# Altium PCB LPGDetA1_F.PcbDoc
Units mm, origin at the board's own origin, x right, y up, seen from the top; angles counter-clockwise.
Board outline 226 x 216 mm, 2 copper layers (Top Layer, Bottom Layer); 2 components, 0 nets, 6 pads, 0 vias.
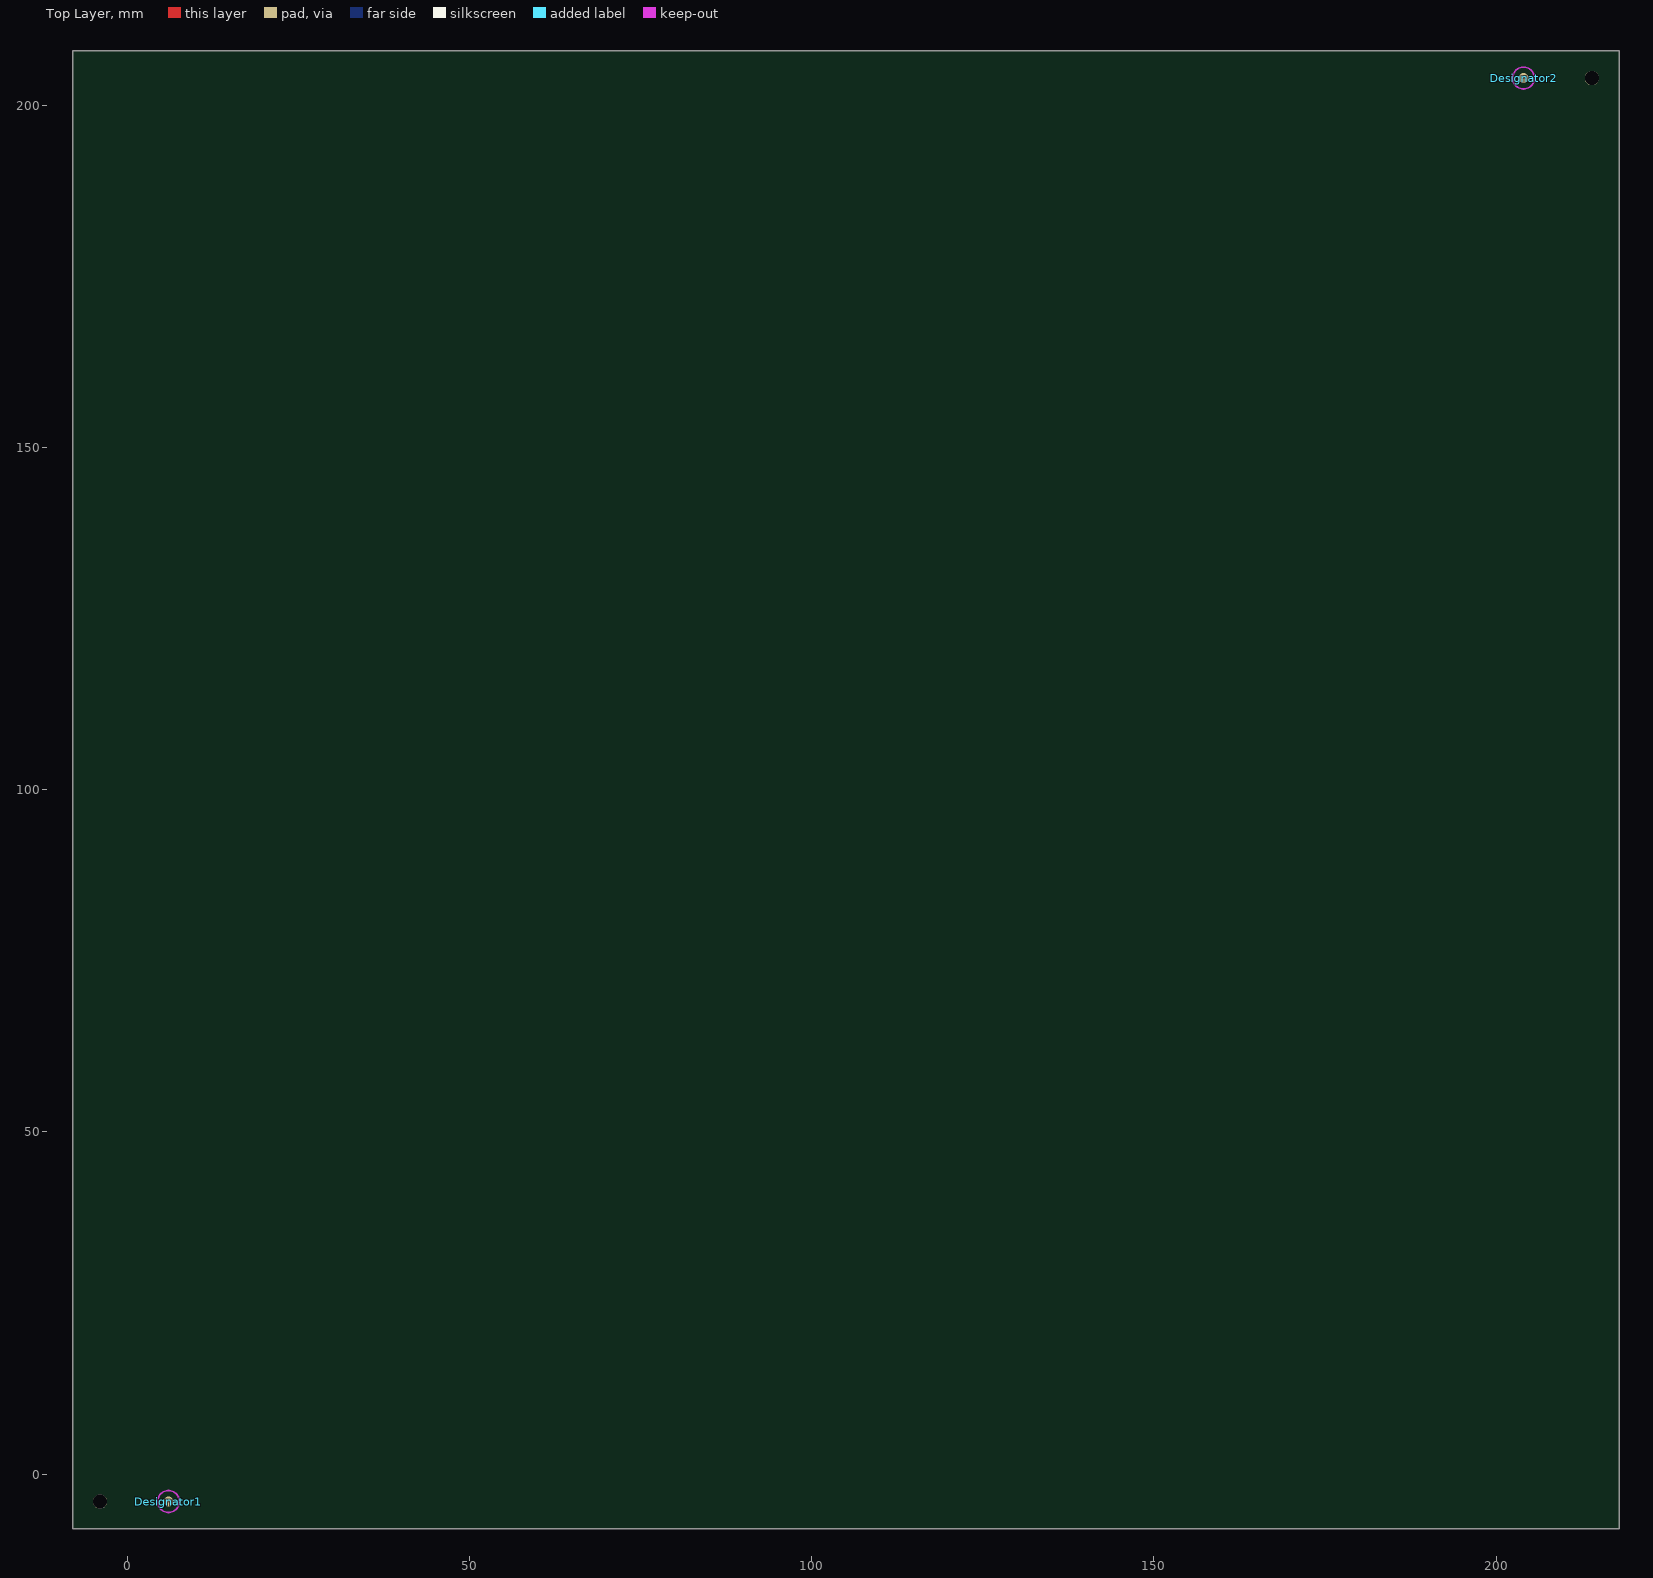
[diagram p0: Top Layer view]
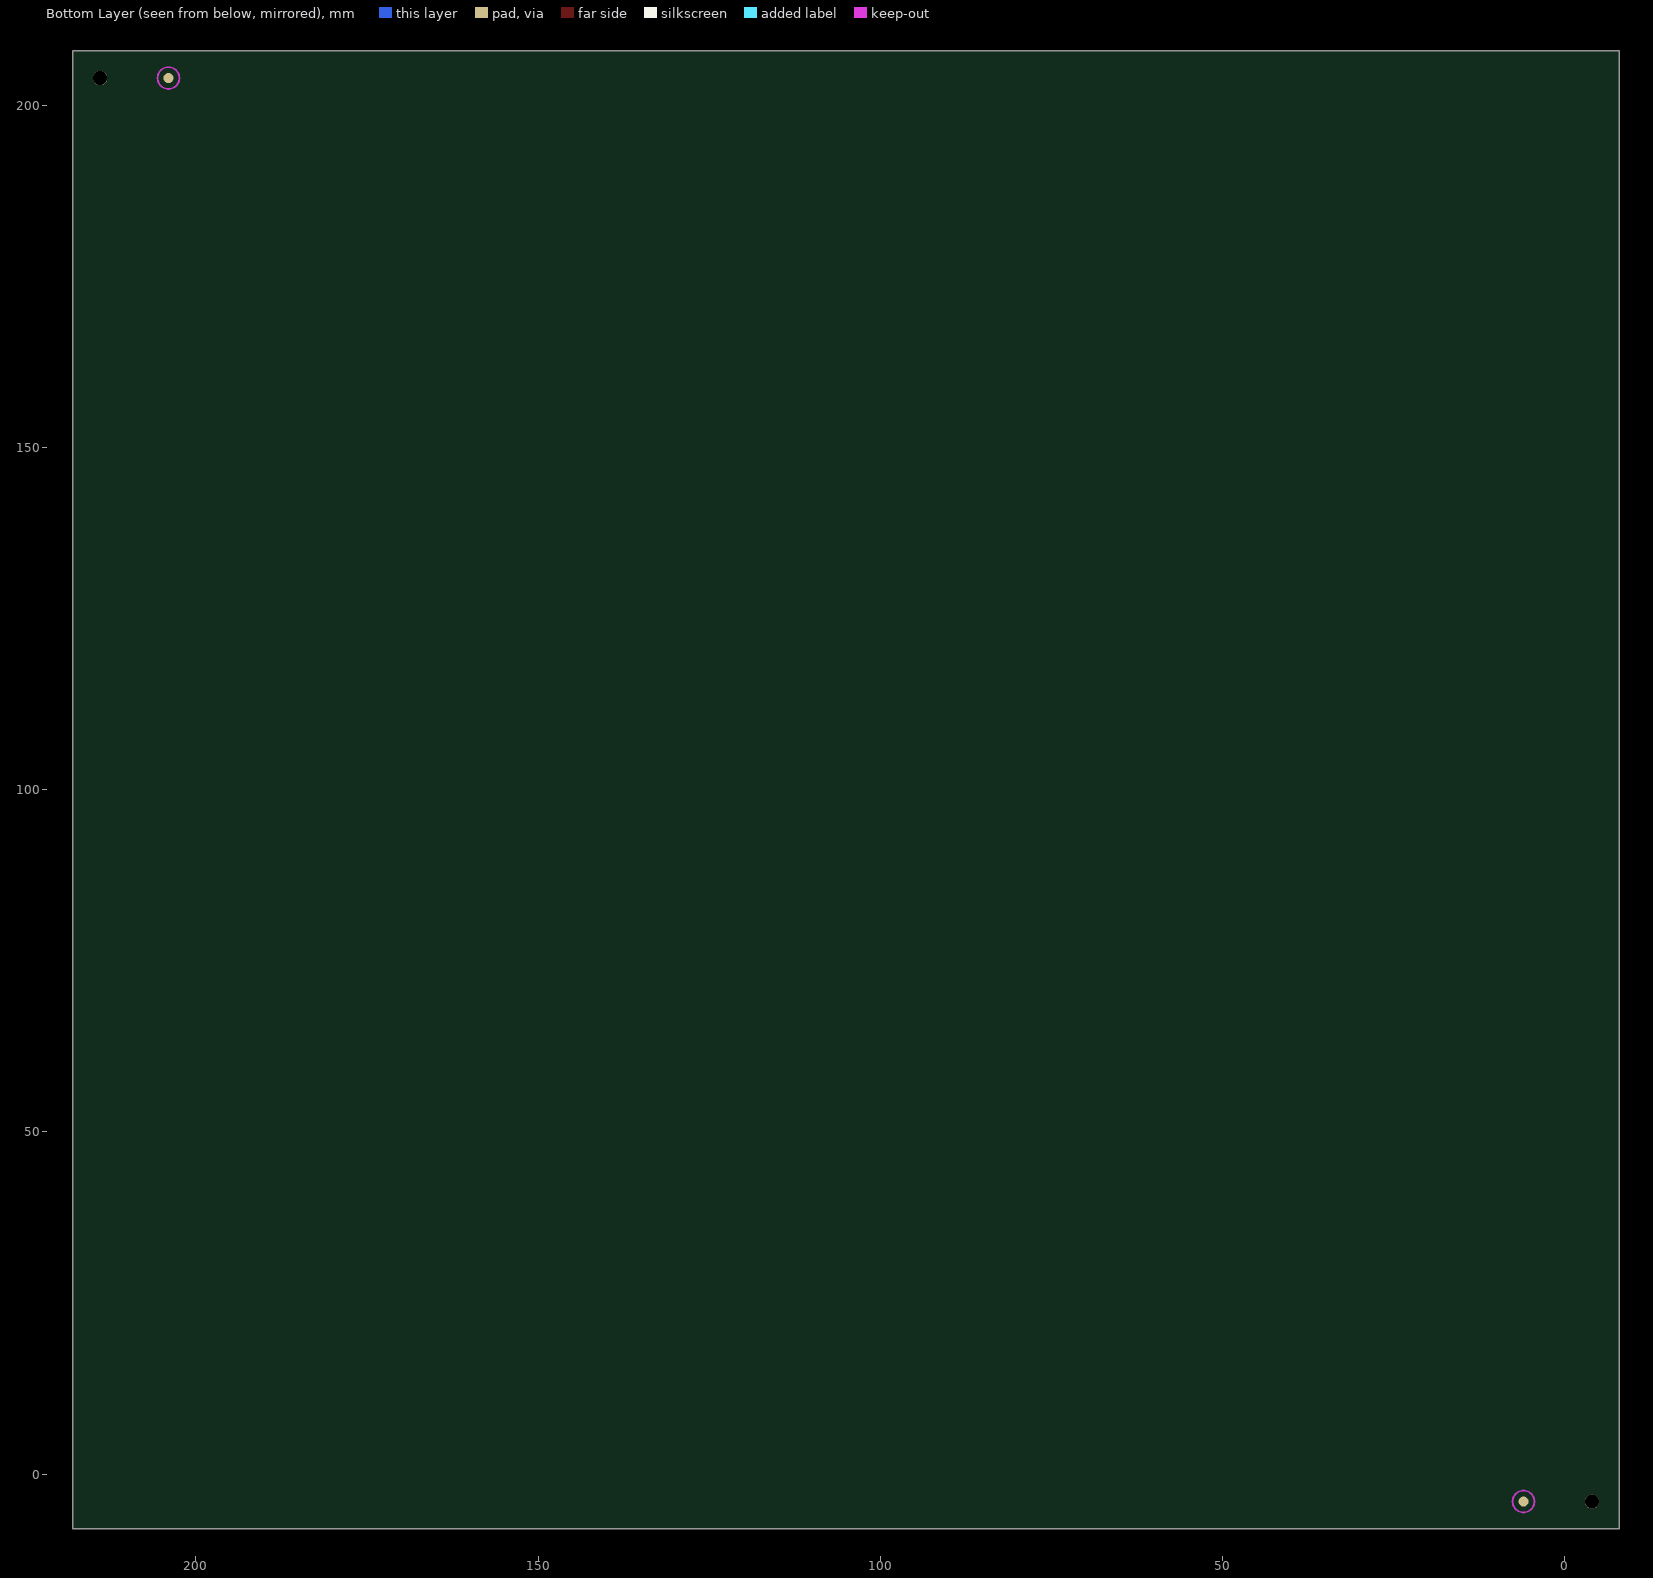
[diagram p1: Bottom Layer view, seen from below]

## Layer stack, top to bottom
Top Layer: signal copper 0.0356
Dielectric: dielectric 0.32, FR-4, Dk 4.8
Bottom Layer: signal copper 0.0356

## Board outline
-8,-8 -8,208 218,208 218,-8

## Design rules (kind name [scope] priority, off if disabled: settings)
Clearance [All] p1: gap=0.254
PolygonConnect [All] p1: connectstyle=Relief reliefconductorwidth=0.254 reliefentries=4 polygonreliefangle="90 Angle"
RoutingVias [All] p1: holewidth=0.711 width=1.27 viastyle="Through Hole" minholewidth=0.711 minwidth=1.27 maxholewidth=0.711 maxwidth=1.27
SilkscreenOverComponentPads [All] p1: minsilkscreentomaskgap=0.254
SolderMaskExpansion [All] p1: expansion=0.102
Width [All] p1: maxlimit=0.254 minlimit=0.254 preferedwidth=0.254
27 further rules are at their usual default settings.

## Components (designator, comment, footprint, x,y, rotation, side; value= is the part's Value field where it differs from the comment)
Designator1 "Comment" REF_CIR 6,-4 r0 top
Designator2 "Comment" REF_CIR 204,204 r180 top

## Footprints (in the part's own frame and the unit in brackets; to place one, negate y for a bottom-side part, rotate by r counter-clockwise, add the part's x,y. Pads: shape width x height; smd on the part's side, far side on the other; paste and mask are expansions set on the pad)
REF_CIR [mm]
  round 1.5 smd paste-0.75 mask+0.75: 1(0,0)
  round 1.5 smd far side paste-0.75 mask+0.75: 1(0,0)
  Top Layer keep-out circle w0.254: c0,0 r1.6
  Bottom Layer keep-out circle w0.254: c0,0 r1.6

## Free pads (board coordinates)
  round 2.1 hole 2.1: 0(-4,-4) 0(214,204)

## Nets (pads, with @x,y where several pads share a name; then routed paths per layer and width w, separated by ;. In a path a pad name is that pad's centre, name@x,y a point inside that pad or via, vN(x,y) a via of type N, cw(c..) or ccw(c..) an arc to the next point about the centre after c; other vN are vias at no path point)
pads on no net: Designator1.1 Designator2.1

## Silkscreen, mask and mechanical layers (free items; w line width, h text height)
Obrys:
  the board outline again, w0.2
VCut:
  lines w0.2: -8,0 218,0 ; -8,100 218,100 ; 0,-8 0,208 ; 105,-8 105,208 ; 210,-8 210,208 ; -8,-8 -8,208 218,208 218,-8 -8,-8

## Dimensions
-8,-8 to 218,-8 on Dims
218,-8 to 218,208 on Dims

## Panel: embedded boards
"LPGDetA1.PcbDoc" at 0,0, 2 rows x 2 columns, spacing 100 x 105, rotation 0